# EAGLE board electrical_project (EAGLE 9.7.0)

Size 171.99 x 82.4 mm. Coordinates in mm from the lower left corner, seen from the top.
Outline: 0,0 171.99,0 171.99,82.4 0,82.4 0,0
Copper layers (1*16): Top 0.035mm / dielectric 1.5mm / Bottom 0.035mm
Design rules "default": minimum track width 6mil, minimum drill 0.35mm, track to track 6mil, track to pad 6mil, pad to pad 6mil, via to via 6mil, smd to smd 6mil, copper to edge 40mil, drill to drill 6mil, minimum pad ring 10mil, minimum via ring 8mil, stop-mask expansion 4mil, vias tented up to drill 0mil, thermal gap 10mil

## Footprints (pad centres in the part's own frame; a part is rotated, then mirrored left to right if it is on the bottom)
LEDRD254W60D565H860B = drill 0.981 pad 1.581: 1 -1.27,0; 2 1.27,0
RESAD1016W63L850D250B = drill 0.83 pad 1.43: 1 -5.08,0; 2 5.08,0
SWITCH-SPDT-PTH-8.5X3.7MM = drill 1.016 pad 1.88: 1 -2.54,0; 2 0,0; 3 2.54,0
ARDUINO-UNO-R3-SHIELD = drill 1.016 pad 1.88: 3.3V 24.13,-2.54; 5V 24.13,0; A0 24.13,12.7; A1 24.13,15.24; A2 24.13,17.78; A3 24.13,20.32; A4 24.13,22.86; A5 24.13,25.4; AREF -24.13,-13.97; D2 -24.13,20.32; D3 -24.13,17.78; D4 -24.13,15.24; D5 -24.13,12.7; D6 -24.13,10.16; D7 -24.13,7.62; D8 -24.13,3.81; D9 -24.13,1.27; D10 -24.13,-1.27; D11 -24.13,-3.81; D12 -24.13,-6.35; D13 -24.13,-8.89; GND@0 24.13,2.54; GND@1 24.13,5.08; GND@2 -24.13,-11.43; IOREF 24.13,-7.62; NC 24.13,-10.16; RES 24.13,-5.08; RX -24.13,25.4; SCL -24.13,-19.05; SDA -24.13,-16.51; TX -24.13,22.86; VIN 24.13,7.62

## Placement (x,y rotation side)
DLED_1  RED  [LEDRD254W60D565H860B]  102.34,39.44 180 top
DLED_2  RED  [LEDRD254W60D565H860B]  112.5,39.44 180 top
DLED_3  RED  [LEDRD254W60D565H860B]  122.66,39.44 180 top
DLED_4  RED  [LEDRD254W60D565H860B]  132.82,39.44 180 top
DLED_5  RED  [LEDRD254W60D565H860B]  142.98,39.44 180 top
DLED_6  RED  [LEDRD254W60D565H860B]  153.14,39.44 180 top
R1  330  [RESAD1016W63L850D250B]  141.71,52.14 90 top
R2  330  [RESAD1016W63L850D250B]  151.87,52.14 270 top
R4  330  [RESAD1016W63L850D250B]  131.55,52.14 90 top
R5  330  [RESAD1016W63L850D250B]  121.39,52.14 90 top
R6  330  [RESAD1016W63L850D250B]  111.23,52.14 90 top
R7  330  [RESAD1016W63L850D250B]  101.07,52.14 90 top
SINTERRUP_1  TOGGLE  [SWITCH-SPDT-PTH-8.5X3.7MM]  164.57,39.44 0 top
UUNO_1  ARDUINO-UNO-R3-SHIELD  [ARDUINO-UNO-R3-SHIELD]  29.84,34.52 180 top

## Library data of the parts
DLED_1-DLED_6 = Tinkercad; CATEGORY: Opto-Electronic; SUB-CATEGORY: LED; VALUE: LED_RED
R1 R2 R4-R7 SINTERRUP_1 UUNO_1 = Tinkercad

## Nets
DLED_1_C: DLED_1.2 R7.1
DLED_2_C: DLED_2.2 R6.1
DLED_3_C: DLED_3.2 R5.1
DLED_4_C: DLED_4.2 R4.1
DLED_5_C: DLED_5.2 R1.1
DLED_6_C: DLED_6.2 R2.2
UUNO_1_5V: SINTERRUP_1.3 UUNO_1.5V
UUNO_1_A0: SINTERRUP_1.2 UUNO_1.A0
UUNO_1_D2: DLED_1.1 UUNO_1.D2
UUNO_1_D3: DLED_2.1 UUNO_1.D3
UUNO_1_D4: DLED_3.1 UUNO_1.D4
UUNO_1_D5: DLED_4.1 UUNO_1.D5
UUNO_1_D6: DLED_5.1 UUNO_1.D6
UUNO_1_D7: DLED_6.1 UUNO_1.D7
UUNO_1_GND: R1.2 R2.1 R4.2 R5.2 R6.2 R7.2 SINTERRUP_1.1 UUNO_1.GND@0 UUNO_1.GND@1 UUNO_1.GND@2

## Tracks (layer width: path | path; a pad name or v marks a point on that pad's centre or on a via)
DLED_1_C  (1 unrouted)
DLED_2_C  (1 unrouted)
DLED_3_C  (1 unrouted)
DLED_4_C  (1 unrouted)
DLED_5_C  (1 unrouted)
DLED_6_C  (1 unrouted)
UUNO_1_5V  (1 unrouted)
UUNO_1_A0  (1 unrouted)
UUNO_1_D2  (1 unrouted)
UUNO_1_D3  (1 unrouted)
UUNO_1_D4  (1 unrouted)
UUNO_1_D5  (1 unrouted)
UUNO_1_D6  (1 unrouted)
UUNO_1_D7  (1 unrouted)
UUNO_1_GND  (9 unrouted)